# Allegro board M2TOSATA.brd
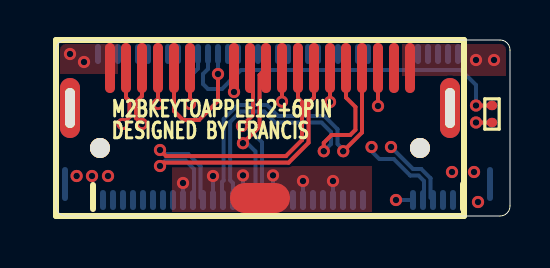
[diagram p0: board, top side]
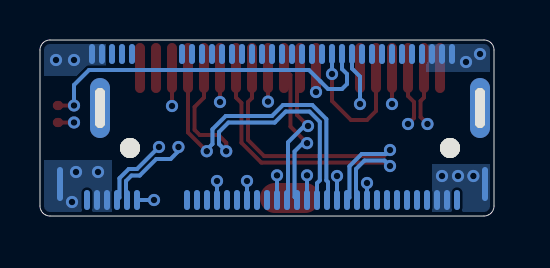
[diagram p1: board, bottom side, seen from below]

Outline 22.7 x 8.8 mm; copper layers: TOP, VCC, GND, BOTTOM. Coordinates in mm from the lower left corner of the outline.
Outline path: 0,8.3 0,0.5 arc(0.15,0.15) 0.5,0 22.2,0 arc(22.55,0.15) 22.7,0.5 22.7,8.3 arc(22.55,8.65) 22.2,8.8 0.5,8.8 arc(0.15,8.65) 0,8.3

## Design rules (mm)
constraint set DEFAULT: min track width 0.127
net group REFCLK: nets REFCLKN REFCLKP
net group SATA-A: nets PETN0/SATA-A- PETP0/SATA-A+
net group SATA-B: nets PERN0/SATA-B+ PERP0/SATA-B-
net group USB_D: nets USB_D+ USB_D-

## Placement (name value [footprint] x y rotation side)
J1  APPLE SATA18PIN  [APPLE_SATA18PIN_M3PAD]  2.7 7.4 0 top
J2  M2 B KEY FLASH  [M2BKEY_SOCKET]  0.4 0.8 0 bottom
R1  0  [D-0402-R]  21.8 5.1 270 top

## Library data of the parts
J1 = CONN TRBLK 18_1
J2 = HEADER 40x2_2
R1 = RESISTOR

## Footprints (pads in the part's own frame, mm; a bottom-side part is the same pattern mirrored in y, then rotated)
APPLE_SATA18PIN_M3PAD
  oval 0.5x2.5 smd: 1(15,0) 2(14.2,0) 3(13.4,0) 4(12.6,0) 5(11.8,0) 6(11,0) 7(10.2,0) 8(9.4,0) 9(8.6,0) 10(7.8,0) 11(7,0) 12(6.2,0) 13(4,0) 14(3.2,0) 15(2.4,0) 16(1.6,0) 17(0.8,0) 18(0,0)
  oval 1x3 hole 0.5x2: M1(-2,-2) M2(17,-2)
  oval 3x1.5 smd: M3(7.5,-6.5)
  round 1 hole 1: M4(-0.5,-4) M5(15.5,-4)
D-0402-R
  oval 0.465x0.52 smd: 1(-0.425,0) 2(0.425,0)
M2BKEY_SOCKET
  oval 0.3x1 smd: 1(19.95,0) 2(19.7,-7.3) 3(19.45,0) 4(19.2,-7.3) 5(18.95,0) 6(18.7,-7.3) 7(18.45,0) 8(18.2,-7.3) 9(17.95,0) 10(17.7,-7.3) 11(17.45,0) 20(15.2,-7.3) 21(14.95,0) 22(14.7,-7.3) 23(14.45,0) 24(14.2,-7.3) 25(13.95,0) 26(13.7,-7.3) 27(13.45,0) 28(13.2,-7.3) 29(12.95,0) 30(12.7,-7.3) 31(12.45,0) 32(12.2,-7.3) 33(11.95,0) 34(11.7,-7.3) 35(11.45,0) 36(11.2,-7.3) 37(10.95,0) 38(10.7,-7.3) 39(10.45,0) 40(10.2,-7.3) 41(9.95,0) 42(9.7,-7.3) 43(9.45,0) 44(9.2,-7.3) 45(8.95,0) 46(8.7,-7.3) 47(8.45,0) 48(8.2,-7.3) 49(7.95,0) 50(7.7,-7.3) 51(7.45,0) 52(7.2,-7.3) 53(6.95,0) 54(6.7,-7.3) 55(6.45,0) 56(6.2,-7.3) 57(5.95,0) 58(5.7,-7.3) 59(5.45,0) 60(5.2,-7.3) 61(4.95,0) 62(4.7,-7.3) 63(4.45,0) 64(4.2,-7.3) 65(3.95,0) 66(3.7,-7.3) 67(3.45,0) 68(3.2,-7.3) 69(2.95,0) 70(2.7,-7.3) 71(2.45,0) 72(2.2,-7.3) 73(1.95,0) 74(1.7,-7.3) 75(1.45,0)
  oval 0.3x1.7 smd: M1(21.3,-0.8) M2(0.05,-0.8)

## Nets
GND: J1.3 J1.6 J1.9 J1.12 J1.15 J1.M1 J1.M2 J1.M3 J2.3 J2.5 J2.11 J2.27 J2.33 J2.39 J2.45 J2.51 J2.57 J2.71 J2.73 J2.M1 J2.M2 R1.2
PERST#(O)(0/3.3V): J1.14 J2.50
PEWAKE#(IO)(0/3.3V): J1.13 J2.54
VCC: J1.1 J1.18 J2.2 J2.4 J2.70 J2.72 J2.74
CLKREQ#(IO)(0/3.3): J2.52 R1.1
PERN0/SATA-B+: J1.11 J2.41
PERP0/SATA-B-: J1.10 J2.43
PETN0/SATA-A-: J1.5 J2.47
PETP0/SATA-A+: J1.4 J2.49
REFCLKN: J1.8 J2.53
REFCLKP: J1.7 J2.55
USB_D+: J1.17 J2.7
USB_D-: J1.16 J2.9

Pads without a net: J1 2 M4 M5; J2 1 6 8 10 20 21 22 23 24 25 26 28 29 30 31 32 34 35 36 37 38 40 42 44 46 48 56 58 59 60 61 62 63 64 65 66 67 68 69 75

## Via types
v1: diameter 0.61, hole 0.33, TOP to BOTTOM, 36 vias

## Routing (per net, layer and track width the routed paths; a pad name or vN(x,y) marks a point on that pad's centre or on a via; arc(x,y) is an arc through that point)
GND: length 16.3
  TOP w0.2: J1.15 v1(5.1,5.6) ; J1.9 v1(11.3,5.72) ; J1.3 v1(16.1,5.5) ; R1.2 v1(21,4.67) ; v1(8.9,6.2) J1.12 ; J1.6 v1(13.7,5.7)
  BOTTOM w0.2: J2.57 v1(6.35,1.65) ; J2.45 v1(9.35,2.03) ; J2.11 v1(17,0.8) ; J2.27 v1(13.85,1.75) ; J2.33 v1(12.35,1.75) ; J2.51 v1(7.85,2) ; J2.39 v1(10.85,2.03)
  vias: v1(1.03,2) v1(1.8,2) v1(2.6,2) v1(19.8,2.2) v1(20.9,2.2) v1(21.1,0.7)
PERST#(O)(0/3.3V): length 7.3
  TOP w0.2: J1.14 5.9,5.25 6.35,4.8 7.15,4.8 8.1,5.75 v1(8.1,7.1)
  BOTTOM w0.2: J2.50 v1(8.1,7.1)
PEWAKE#(IO)(0/3.3V): length 4.5
  TOP w0.2: v1(6.7,5.6) J1.13
  BOTTOM w0.2: J2.54 7.1,7.37 6.7,6.97 v1(6.7,5.6)
VCC:
  vias: v1(0.7,8.1) v1(1.4,7.7) v1(21,7.8) v1(21.9,7.8)
CLKREQ#(IO)(0/3.3): length 17.9
  TOP w0.2: R1.1 v1(21,5.52)
  BOTTOM w0.2: v1(21,5.52) 21,6.55 20.25,7.3 9.25,7.3 8.68,6.73 8.68,6.73 8.3,6.35 7.6,6.35 7.35,6.6 7.35,7.1 7.6,7.35 J2.52
PERN0/SATA-B+: length 7.4
  TOP w0.2: J1.11 9.7,7.26 9.85,7.11 9.85,5.05 v1(9.3,4.5)
  BOTTOM w0.2: v1(9.3,4.5) 9.48,4.5 10.3,3.68 10.3,0.85 J2.41
PERP0/SATA-B-: length 7.5
  TOP w0.2: v1(9.35,3.64) 10.18,4.47 10.18,7.05 10.5,7.37 J1.10
  BOTTOM w0.2: v1(9.35,3.64) 9.56,3.64 9.97,3.23 9.97,0.94 9.9,0.87 9.9,0.85 J2.43
PETN0/SATA-A-: length 16.3
  TOP w0.2: v1(13.39,3.24) 13.39,3.66 13.78,4.05 14.71,4.05 14.97,4.31 14.97,5.45 14.5,5.92 J1.5
  BOTTOM w0.2: J2.47 8.85,1.64 8.71,1.78 8.71,4.71 9.22,5.22 10.41,5.22 10.96,4.67 13.28,4.67 13.75,4.2 13.75,3.6 v1(13.39,3.24)
PETP0/SATA-A+: length 16.4
  TOP w0.2: J1.4 15.3,4.18 v1(14.36,3.24)
  BOTTOM w0.2: J2.49 8.3,0.85 8.3,1.7 8.38,1.78 8.38,4.84 9.09,5.55 10.55,5.55 11.1,5 13.41,5 14.08,4.34 14.08,3.6 14.36,3.31 v1(14.36,3.24)
REFCLKN: length 15.3
  TOP w0.2: J1.8 12.1,5.9 12.3,5.7 12.3,3.8 11.5,3 5.5,3 v1(5.2,3.3)
  BOTTOM w0.2: v1(5.2,3.3) 5.4,3.1 6.61,3.1 7.23,2.49 7.23,0.92 J2.53
REFCLKP: length 15.3
  TOP w0.2: J1.7 12.9,5.92 12.63,5.65 12.63,3.66 11.63,2.67 5.37,2.67 v1(5.2,2.5)
  BOTTOM w0.2: J2.55 6.9,0.85 6.9,2.35 6.48,2.77 5.47,2.77 v1(5.2,2.5)
USB_D+: length 25.7
  TOP w0.2: J1.17 3.5,5.92 3.67,5.75 3.67,4.95 v1(3.33,4.6)
  GND w0.2: v1(3.33,4.6) 3.62,4.3 3.62,1.68 4.7,0.6 15.8,0.6 16.73,1.53 16.73,3.43 v1(16.75,3.45)
  BOTTOM w0.2: J2.7 18.73,0.92 18.73,1.89 18.26,2.35 17.85,2.35 v1(16.75,3.45)
USB_D-: length 25.7
  TOP w0.2: v1(4.3,4.6) 4,4.9 4,5.7 4.3,6 J1.16
  GND w0.2: v1(15.78,3.45) 15.99,3.45 16.4,3.04 16.4,1.66 15.66,0.93 4.84,0.93 3.95,1.81 3.95,4.25 v1(4.3,4.6)
  BOTTOM w0.2: J2.9 18.4,0.85 18.4,1.75 18.13,2.02 17.71,2.02 16.89,2.85 16.17,2.85 15.78,3.24 v1(15.78,3.45)

## Copper pours and planes (outline as drawn; the poured copper is in the pictures)
GND on TOP: 5.8,2.5 15.8,2.5 15.8,0.2 5.8,0.2
GND on BOTTOM: 0.2,2.6 3.1,2.6 3.1,0.2 0.5,0.2 0.29,0.29 0.2,0.5
GND on BOTTOM: 19.1,2.8 22.5,2.8 22.5,0.5 22.41,0.29 22.2,0.2 19.1,0.2
GND on GND: 0.2,8.3 0.29,8.51 0.5,8.6 22.2,8.6 22.41,8.51 22.5,8.3 22.5,0.5 22.41,0.29 22.2,0.2 0.5,0.2 0.29,0.29 0.2,0.5
VCC on TOP: 17.3,8.6 22.2,8.6 22.41,8.51 22.5,8.3 22.5,7 17.3,7
VCC on TOP: 0.2,8.3 0.29,8.51 0.5,8.6 3.1,8.6 3.1,7.1 0.2,7.1
VCC on BOTTOM: 19.4,8.6 22.2,8.6 22.41,8.51 22.5,8.3 22.5,7 19.4,7
VCC on BOTTOM: 0.2,8.3 0.29,8.51 0.5,8.6 3.4,8.6 3.4,7.2 0.2,7.2
VCC on VCC: 0.2,8.3 0.29,8.51 0.5,8.6 22.2,8.6 22.41,8.51 22.5,8.3 22.5,0.5 22.41,0.29 22.2,0.2 0.5,0.2 0.29,0.29 0.2,0.5

## Text on the board
Ref Des/Silkscreen Top: M2BKEYTOAPPLE12+6PIN | DESIGNED BY FRANCIS
